# Altium PCB Robot.PcbDoc
Units mil, origin at the board's own origin, x right, y up, seen from the top; angles counter-clockwise.
Board outline 3890.31 x 3610.54 mil, 2 copper layers (TopLayer, BottomLayer); 99 components, 107 nets, 414 pads, 179 vias.
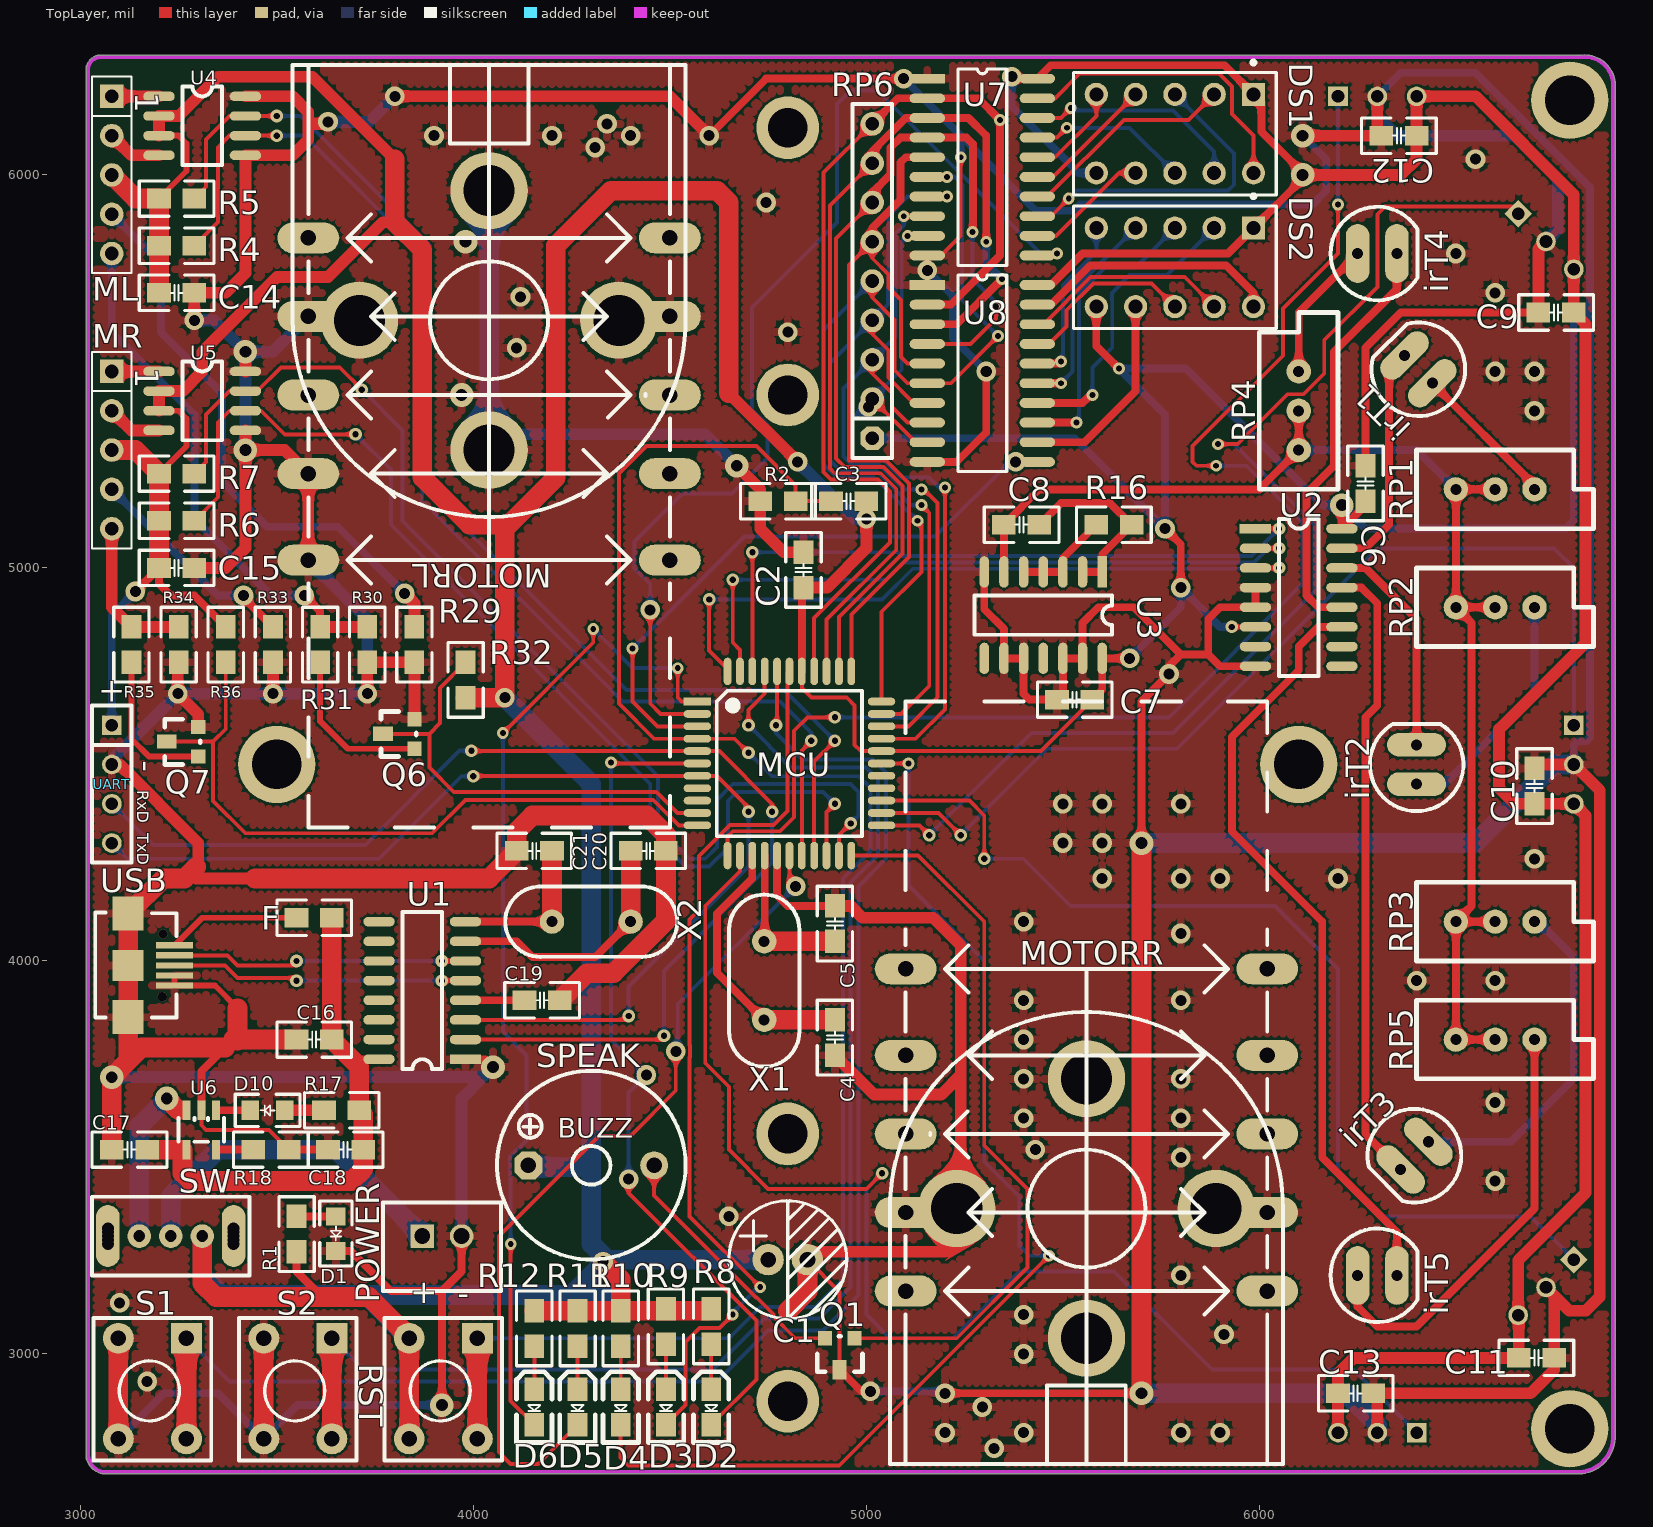
[diagram p0: TopLayer view]
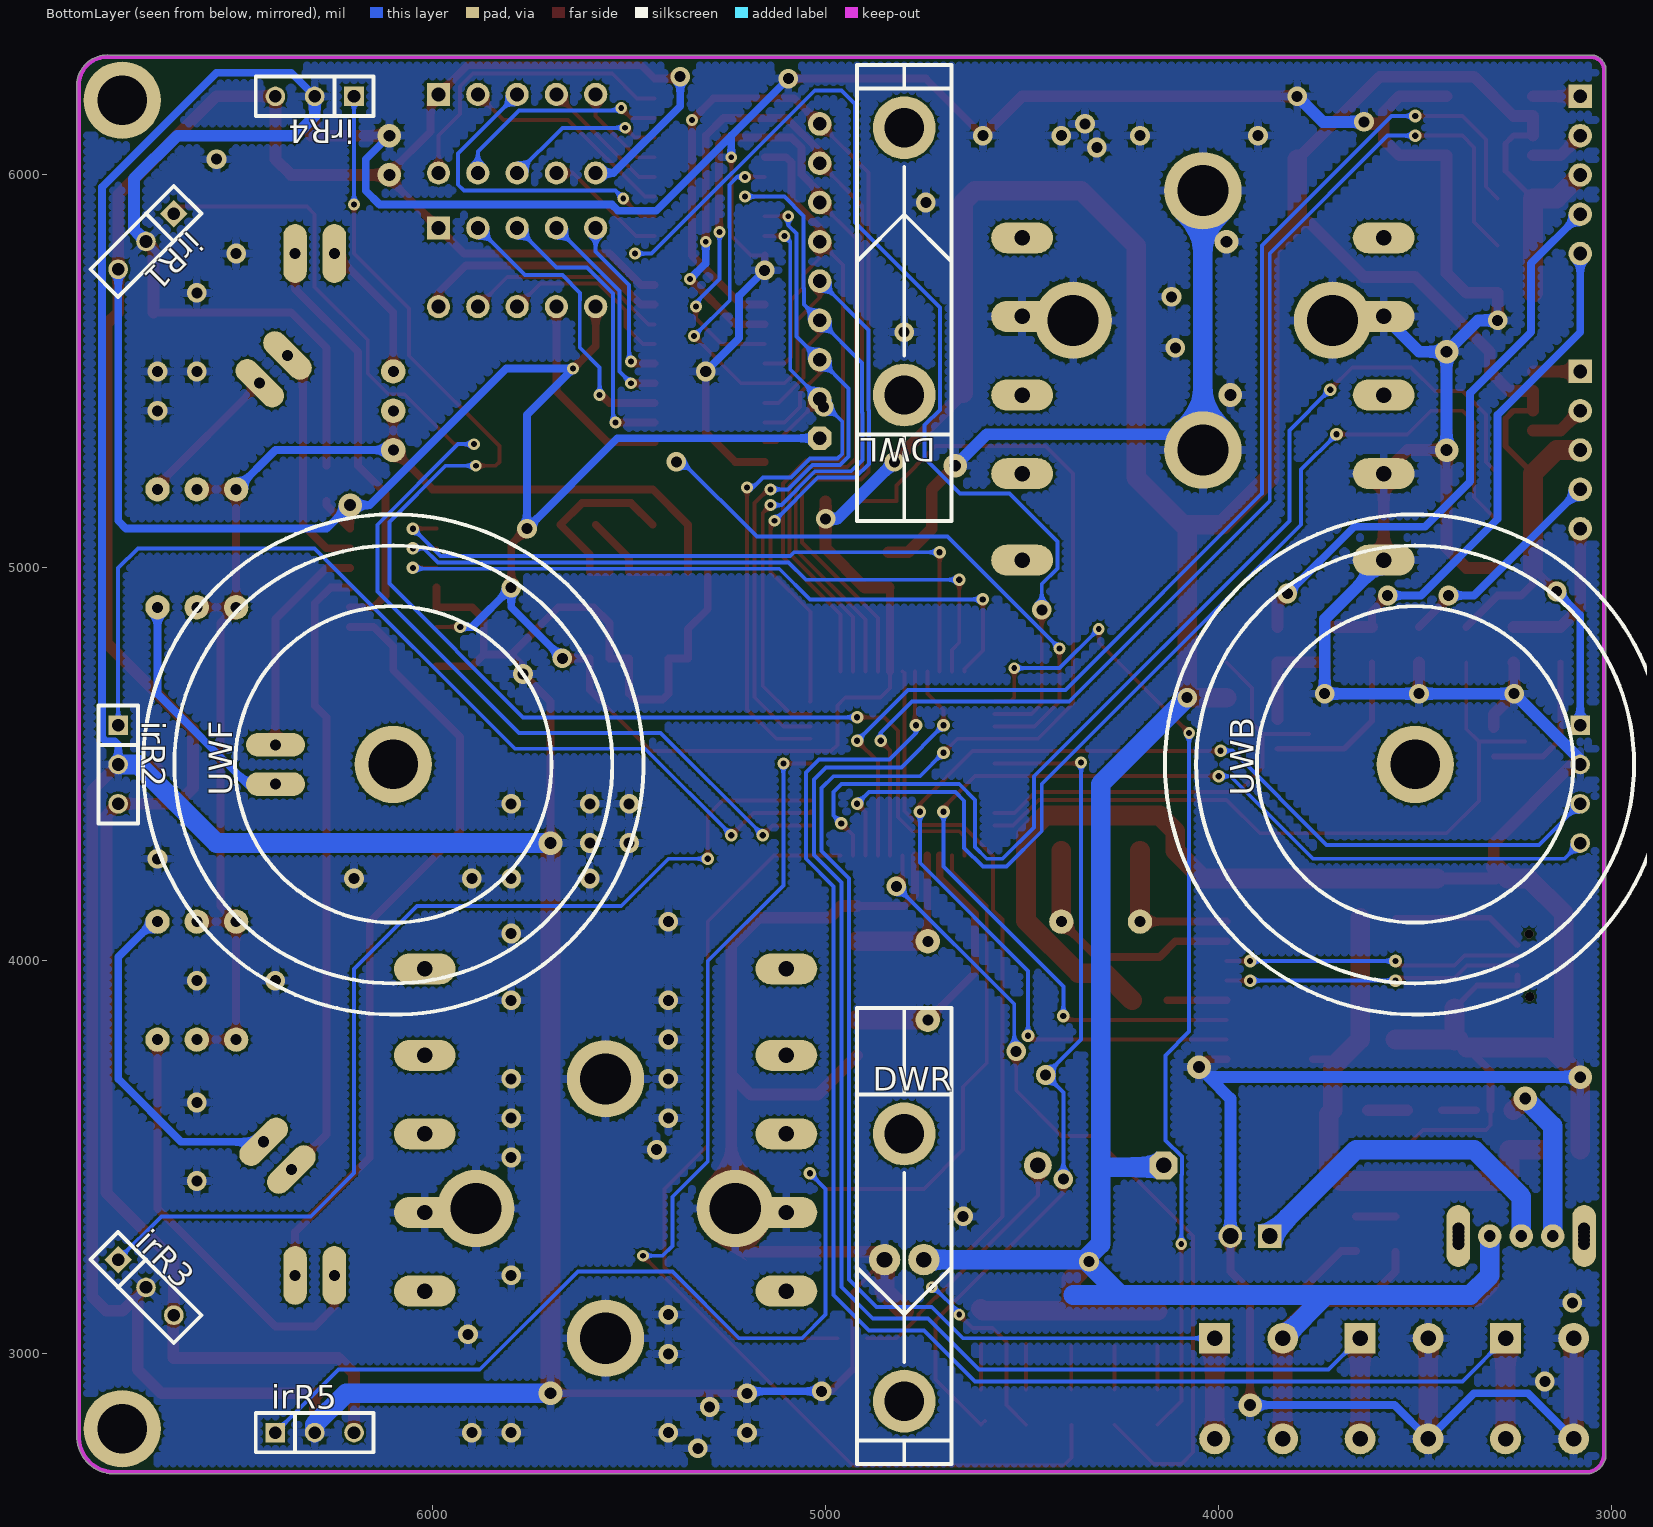
[diagram p1: BottomLayer view, seen from below]

## Layer stack, top to bottom
TopSolder: solder mask 0.4, Solder Resist, Dk 3.5
TopLayer: signal copper 1.4
Dielectric1: core 12.6, FR-4, Dk 4.8
BottomLayer: signal copper 1.4
BottomSolder: solder mask 0.4, Solder Resist, Dk 3.5

## Board outline
3014.99,2739.73 cw(c3065,2745) 3014.99,2750.27 3014.99,6264.81 cw(c3052.5,6267.5) 3014.99,6270.19 3014.99,6275 cw(c3020,6275) 3016.59,6278.67 cw(c3052.5,6267.5) 3049.62,6305 cw(c3050,6300) 3050,6305.02 6819.74,6305.02 cw(c6827.5,6227.5) 6904.99,6235.52 cw(c6900,6235) 6905.02,6235 6905.02,2785 6905.01,2785 cw(c6900,2785) 6905.01,2784.72 cw(c6810,2790) 6822.54,2695.68 cw(c6820,2700) 6820,2694.99 6815.14,2694.99 cw(c6810,2790) 6804.86,2694.99 3060,2694.99 cw(c3060,2700) 3059.45,2695.02 cw(c3065,2745) 3016.61,2731.31 cw(c3020,2735) 3014.99,2735

## Design rules (kind name [scope] priority, off if disabled: settings)
Clearance [All] p1: gap=6
FabricationTestPointUsage TestPointUsage [All] p1: valid=0 allowmultiple=FALSE
FabricationTestpoint Testpoint [All] p1: side=3 testpointundercomponent=TRUE minsize=40 maxsize=100 preferedsize=60 minholesize=20 maxholesize=40 preferedholesize=32 testpointgrid=1 allowsidetop=TRUE allowsidebottom=TRUE usegrid=TRUE gridtolerance=0.01
PasteMaskExpansion PasteMaskExpansion_1 [All] p1: expansion=0
PasteMaskExpansion [All] p2: expansion=0
PlaneClearance PlaneClearance_1 [All] p1: clearance=20
PlaneClearance [All] p2: clearance=10
PolygonConnect [All] p1: connectstyle=Relief reliefconductorwidth=20 reliefentries=4 polygonreliefangle="90 Angle" airgapwidth=10
RoutingVias [All] p1: holewidth=28 width=50 viastyle="Through Hole" minholewidth=28 minwidth=50 maxholewidth=28 maxwidth=50
ShortCircuit ShortCircuit_1 [All] p1: allowed=FALSE
ShortCircuit [All] p2: allowed=FALSE
SolderMaskExpansion SolderMaskExpansion_1 [All] p1: expansion=4
SolderMaskExpansion [All] p2: expansion=2
UnRoutedNet UnRoutedNet_1 [All] p1:
UnRoutedNet [All] p2:
Width [All] p1: maxlimit=50 minlimit=10 preferedwidth=20 minimp=50.000000 maximp=50.000000 favimp=50.000000
24 further rules are at their usual default settings.

## Components (designator, comment, footprint, x,y, rotation, side; value= is the part's Value field where it differs from the comment)
C1 "1000uF" RB.1/.3 4750,3240 r180 top
C2 "104" 0805C 4840,4950 r90 top
C3 "474" 0805C 5000,5170 r180 top
C4 "20" 0805C 4920,3850 r270 top
C5 "20" 0805C 4920,4050 r90 top
C6 "104" 0805C 6270,5260 r270 top
C7 "104" 0805C 5575,4665 r180 top
C8 "102" 0805C 5350,5110 r0 top
C9 "104" 0805C 6800,5650 r180 top
C10 "104" 0805C 6700,4400 r90 top
C11 "104" 0805C 6660,2990 r0 top
C12 "104" 0805C 6400,6100 r180 top
C13 "104" 0805C 6200,2900 r0 top
C14 "104" 0805C 3200,5700 r0 top
C15 "104" 0805C 3200,5000 r0 top
C16 "10uF" 0805C 3640,3800 r180 top
C17 "1uF" 0805C 3170,3520 r180 top
C18 "104" 0805C 3720,3520 r180 top
C19 "103" 0805C 4220,3900 r180 top
C20 "20" 0805C 4400,4280 r0 top
C21 "20" 0805C 4200,4280 r180 top
D1 "LED" 0805D#1 3650,3350 r270 top
D2 "LED" 0805D#2 4605,2910 r270 top
D3 "LED" 0805D#2 4490,2910 r270 top
D4 "LED" 0805D#2 4375,2910 r270 top
D5 "LED" 0805D#2 4265,2910 r270 top
D6 "LED" 0805D#2 4155,2910 r270 top
D10 "LED" 0805D#1 3520,3620 r180 top
DS1 "Dpy Red-CA" A 5785,6105 r270 top
DS2 "Dpy Red-CA" A 5785,5765 r270 top
DWL "DW" DW 4800,5440 r90 bottom
DWR "DW" DW 4800,3560 r270 bottom
F "500MA" 0805R 3550,4110 r0 top
irR1 "HS0038" SIP3 6658.58,5901.42 r315 bottom
irR2 "HS0038" SIP3 6800,4600 r270 bottom
irR3 "HS0038" SIP3 6800,3240 r225 bottom
irR4 "HS0038" SIP3 6200,6200 r0 bottom
irR5 "HS0038" SIP3 6400,2800 r180 bottom
irT1 "irLED" LED-5-TOP 6440,5470 r135 top
irT2 "irLED" LED-5-TOP 6400,4450 r90 top
irT3 "irLED" LED-5-TOP 6430,3540 r225 top
irT4 "irLED" LED-5-TOP 6250,5800 r0 top
irT5 "irLED" LED-5-TOP 6250,3200 r0 top
MCU "STC89C52" TQFP-44 4570,4660 r0 top
ML "Comment" SIP5 3080,6200 r270 top
MOTORL "MOTOR" MOTOR 4040,5320 r90 top
MOTORR "MOTOR" MOTOR 5560,3680 r270 top
MR "Comment" SIP5 3080,5500 r270 top
POWER "DC3.7V" XH2.54-2P 3870,3300 r0 top
Q1 "8550" SOT-23-P 4970,3040 r180 top
Q6 "Comment" SOT-23-N 3850,4540 r90 top
Q7 "Comment" SOT-23-N 3300,4520 r90 top
R1 "2K" 0805R 3550,3260 r90 top
R2 "10K" 0805R 4730,5170 r0 top
R4 "2K" 0805R 3200,5820 r0 top
R5 "2K" 0805R 3200,5940 r0 top
R6 "2K" 0805R 3200,5120 r0 top
R7 "2K" 0805R 3200,5240 r0 top
R8 "2K" 0805R 4605,3115 r270 top
R9 "2K" 0805R 4490,3115 r270 top
R10 "2K" 0805R 4375,3110 r270 top
R11 "2K" 0805R 4265,3110 r270 top
R12 "2K" 0805R 4155,3110 r270 top
R16 "13K" 0805R 5675,5110 r180 top
R17 "2K" 0805R 3710,3620 r180 top
R18 "2K" 0805R 3530,3520 r180 top
R29 "Comment" 0805R 3850,4850 r270 top
R30 "Comment" 0805R 3730,4850 r270 top
R31 "Comment" 0805R 3610,4850 r270 top
R32 "Comment" 0805R 3980,4670 r90 top
R33 "Comment" 0805R 3490,4850 r270 top
R34 "Comment" 0805R 3250,4850 r270 top
R35 "Comment" 0805R 3130,4850 r270 top
R36 "Comment" 0805R 3370,4850 r270 top
RP1 "100K" VR-5 6500,5200 r0 top
RP2 "100K" VR-5 6500,4900 r0 top
RP3 "100K" VR-5 6500,4100 r0 top
RP4 "100K" VR-5 6100,5300 r90 top
RP5 "100K" VR-5 6500,3800 r0 top
RP6 "10K" "SIP9 - duplicate" 5015,5330 r90 top
RST "SW-PB" SWITCH 4010,3040 r270 top
S1 "SW-PB" SWITCH 3270,3040 r270 top
S2 "SW-PB" SWITCH 3640,3040 r270 top
SPEAK "BUZZER" BUZZ 4140,3480 r0 top
SW "SW SPDT" SW-1-2 3150,3300 r0 top
U1 "CH340G" SOP-16 3980,3750 r180 top
U2 "74HC138" SOP-16 5990,5100 r0 top
U3 "74HC00" SO-14 5600,4990 r270 top
U4 "L9110" SO-8 3200,6200 r0 top
U5 "L9110" SO-8 3200,5500 r0 top
U6 "TP4054" SOT-23-5 3270,3520 r0 top
U7 "74HC573" SOP-20（1.27） 5155,6245 r0 top
U8 "74HC573" SOP-20（1.27） 5155,5720 r0 top
UART "SIP4" SIP4 3080,4600 r270 top
USB "MicroUSB" MircoUSB 3230,4040 r180 top
UWB "UW" UW 3500,4500 r180 bottom
UWF "UW" UW 6100,4500 r180 bottom
X1 "24M" XTAL2 4740,4050 r270 top
X2 "12M" XTAL2 4400,4100 r180 top

## Footprints (in the part's own frame and the unit in brackets; to place one, negate y for a bottom-side part, rotate by r counter-clockwise, add the part's x,y. Pads: shape width x height; smd on the part's side, far side on the other; paste and mask are expansions set on the pad)
0805C [mil]
  rect 60x50 smd: 1(0,0) 2(90,0)
  silkscreen extent -50,-45 140,45
0805D#1 [mil]
  rect 45x50 smd: 1(0,0) 2(88,0)
  silkscreen extent -39,-41 126,41
0805D#2 [mil]
  rect 60x50 smd: 1(0,0) 2(90,0)
  silkscreen extent -45,-45 135,45
0805R [mil]
  rect 60x50 smd: 1(0,0) 2(90,0)
  silkscreen extent -50,-45 140,45
A [mm]
  rect 1.5x1.5 hole 0.9: 1(-2.54,5.08)
  round 1.5 hole 0.9: 2(-2.54,2.54) 3(-2.54,0) 4(-2.54,-2.54) 5(-2.54,-5.08) 6(2.54,-5.08) 7(2.54,-2.54) 8(2.54,0) 9(2.54,2.54) 10(2.54,5.08)
  silkscreen extent -4.72,-6.55 3.95,6.55, body extent -3.95,-6.55 3.95,6.55, height 6.34
BUZZ [mm]
  oct 1.8x1.8 hole 1: 1(0,0)
  round 1.8 hole 1: 2(8.128,0)
  silkscreen extent -2.03,-6.09 10.17,6.11
DW [mil]
  round 160 hole 100: 0(0,0) 0(680,0)
  silkscreen extent -320,-120 840,120
LED-5-TOP [mil]
  oval 60x150 hole 28: 1(0,0) 2(100,0)
  silkscreen extent -69,-119 153,119
MircoUSB [mm]
  rect 2.4x0.4 smd: 1(-0.25,0) 2(-0.25,0.65) 3(-0.25,1.3) 4(-0.25,1.95) 5(-0.25,2.6)
  rect 2x2.2 smd: 6(2.75,4.65) 7(2.75,-2.05)
  rect 2x2 smd: 8(2.75,1.3)
  silkscreen extent -0.37,-2.12 4.88,4.67
MOTOR [mm]
  oval 2x4 hole 1: 0(-7.62,-11.684) 0(-7.62,11.684) 0(-2.032,11.684) 0(-2.032,-11.684) 0(3.048,11.684) 0(3.048,-11.684) 0(8.128,-11.684) 0(8.128,11.684) 0(13.208,-11.684) 0(13.208,11.684)
  silkscreen extent -24.89,-11.68 24.38,11.68
RB.1/.3 [mil]
  round 80 hole 40: 1(0,0) 2(-100,0)
  silkscreen extent -200,-150 100,150
SIP3 [mil]
  rect 50x50 hole 32: 1(0,0)
  round 50 hole 32: 2(100,0) 3(200,0)
  silkscreen extent -50,-50 250,50
SIP4 [mil]
  rect 50x50 hole 32: 1(0,0)
  round 50 hole 32: 2(100,0) 3(200,0) 4(300,0)
  silkscreen extent -50,-50 350,50
SIP5 [mil]
  rect 60x60 hole 35: 1(0,0)
  round 60 hole 35: 2(100,0) 3(200,0) 4(300,0) 5(400,0)
  silkscreen extent -50,-50 450,50
"SIP9 - duplicate" [mil]
  oct 60x60 hole 35: 1(0,0)
  round 60 hole 35: 2(100,0) 3(200,0) 4(300,0) 5(400,0) 6(500,0) 7(600,0) 8(700,0) 9(800,0)
  silkscreen extent -50,-50 850,50
SO-8 [mil]
  oval 80x24 smd: 1(0,0) 2(0,-50) 3(0,-100) 4(0,-150) 5(220,-150) 6(220,-100) 7(220,-50) 8(220,0)
  silkscreen extent 60,-175 160,25
SO-14 [mil]
  rect 80x24 smd: 1(0,0)
  oval 80x24 smd: 2(0,-50) 3(0,-100) 4(0,-150) 5(0,-200) 6(0,-250) 7(0,-300) 8(220,-300) 9(220,-250) 10(220,-200) 11(220,-150) 12(220,-100) 13(220,-50) 14(220,0)
  silkscreen extent 60,-325 160,25
SOP-16 [mil]
  rect 80x24 smd: 1(0,0)
  oval 80x24 smd: 2(0,-50) 3(0,-100) 4(0,-150) 5(0,-200) 6(0,-250) 7(0,-300) 8(0,-350) 9(220,-350) 10(220,-300) 11(220,-250) 12(220,-200) 13(220,-150) 14(220,-100) 15(220,-50) 16(220,0)
  silkscreen extent 60,-375 160,25
SOP-20（1.27） [mil]
  rect 90x25 smd: 1(0,0)
  oval 90x25 smd: 2(0,-50) 3(0,-100) 4(0,-150) 5(0,-200) 6(0,-250) 7(0,-300) 8(0,-350) 9(0,-400) 10(0,-450) 11(280,-450) 12(280,-400) 13(280,-350) 14(280,-300) 15(280,-250) 16(280,-200) 17(280,-150) 18(280,-100) 19(280,-50) 20(280,0)
  silkscreen extent 78,-475 202,25
SOT-23-5 [mil]
  rect 20x50 smd: 1(75,100) 2(38,100) 3(0,100) 4(0,0) 5(75,0)
  silkscreen extent -20,20 95,80
SOT-23-N [mil]
  rect 36x36 smd: 1(0,0) 3(75,0)
  rect 36x50 smd: 2(38,80)
  silkscreen extent -20,-5 95,85
SOT-23-P [mil]
  rect 36x36 smd: 1(0,0) 2(75,0)
  rect 36x50 smd: 3(38,80)
  silkscreen extent -20,-5 95,85
SW-1-2 [mil]
  oval 60x157.48 hole 30: 0(-80,0) 0(240,0)
  round 60 hole 30: 1(80,0) 2(0,0) 3(160,0)
  silkscreen extent -120,-100 280,100
SWITCH [mm]
  rect 2x2 hole 1: 1(0,0)
  round 2 hole 1: 1(6.5,0) 2(0,-4.4) 2(6.5,-4.4)
  silkscreen extent -1.3,-6 7.9,1.6
TQFP-44 [mm]
  rect 1.778x0.5 smd: 1(0,0)
  oval 1.778x0.5 smd: 2(0,-0.8) 3(0,-1.6) 4(0,-2.4) 5(0,-3.2) 6(0,-4) 7(0,-4.8) 8(0,-5.6) 9(0,-6.4) 10(0,-7.2) 11(0,-8) 23(11.9,-8) 24(11.9,-7.2) 25(11.9,-6.4) 26(11.9,-5.6) 27(11.9,-4.8) 28(11.9,-4) 29(11.9,-3.2) 30(11.9,-2.4) 31(11.9,-1.6) 32(11.9,-0.8) 33(11.9,0)
  oval 0.5x1.778 smd: 12(1.95,-9.95) 13(2.75,-9.95) 14(3.55,-9.95) 15(4.35,-9.95) 16(5.15,-9.95) 17(5.95,-9.95) 18(6.75,-9.95) 19(7.55,-9.95) 20(8.35,-9.95) 21(9.15,-9.95) 22(9.95,-9.95) 34(9.95,1.95) 35(9.15,1.95) 36(8.35,1.95) 37(7.55,1.95) 38(6.75,1.95) 39(5.95,1.95) 40(5.15,1.95) 41(4.35,1.95) 42(3.55,1.95) 43(2.75,1.95) 44(1.95,1.95)
  silkscreen extent 1.25,-8.7 10.65,0.7
UW [mm]
  round 5 hole 3.2: 0(0,0)
  silkscreen extent -16.17,-16.17 16.16,16.17
VR-5 [mil]
  round 62 hole 28: 1(0,0) 2(100,0) 3(200,0)
  silkscreen extent -100,-100 350,100
XH2.54-2P [mil]
  rect 60x60 hole 40: 1(0,0)
  round 60 hole 40: 2(100,0)
  silkscreen extent -100,-140 200,85
XTAL2 [mil]
  round 62 hole 28: 1(0,0) 2(200,0)
  silkscreen extent -119,-89 319,89

## Part data
C1: library part ELECTRO1, "Electrolytic Capacitor"
C2 C3 C4 C5 C6 C7 C8 C9 C10 C11 C12 C13 C14 C15 C16 C17 C18 C19 C20 C21: library part CAP, "Capacitor"
DS1 DS2: "7.62 mm Black Surface HER 7-Segment Display: CA, RH DP"
DWL DWR: "driving wheel"
F: library part FUSE1, "Fuse"
irR1 irR2 irR3 irR4 irR5: library part CON3, "Connector"
irT1 irT2 irT3 irT4 irT5: library part LED
MCU: library part STC89C52RC-PQFP, "MCU"
ML MR: library part "Header 5", "5PIN"
POWER: library part CON2, "Connector"
Q1: library part PNP1, "PNP Transistor"
Q6 Q7: library part QNPN, "NPN三极管"
R1 R2 R4 R5 R6 R7 R8 R9 R10 R11 R12 R16 R17 R18: library part RES2
R29 R30 R31 R32 R33 R34 R35 R36: library part Res2, "电阻"
RP1 RP2 RP3 RP4 RP5: library part POT2, "Potentiometer"
RP6: library part "Res Pack2", "9PIN排阻"
SPEAK: "Buzzer"
U1: "USB-SERIAL"
U2: library part 74ALS138
U3: "Quad 2-Input Positive-NAND Gate"
UART: library part CON4, "Connector"
USB: library part CON5, "Connector"
UWB UWF: "universal wheel"
X1 X2: library part CRYSTAL, "Crystal"

## Free pads (board coordinates)
  round 196.85 hole 129.92: 0(3710,5630) 0(4040,5300) 0(4040,5960) 0(4370,5630) 0(5230,3370) 0(5560,3040) 0(5560,3700) 0(5890,3370)
  round 196.85 hole 125.98: 0(6790,2810) 0(6790,6190)

## Via types
v1: diameter 50, hole 28, TopLayer to BottomLayer, 85 vias
v2: diameter 30, hole 15, TopLayer to BottomLayer, 37 vias
v3: diameter 32, hole 16, TopLayer to BottomLayer, 33 vias
v4: diameter 60, hole 30, TopLayer to BottomLayer, 14 vias
v5: diameter 30, hole 30, TopLayer to BottomLayer, 8 vias
v6: diameter 23.62, hole 23.62, TopLayer to BottomLayer, 2 vias

## Nets (pads, with @x,y where several pads share a name; then routed paths per layer and width w, separated by ;. In a path a pad name is that pad's centre, name@x,y a point inside that pad or via, vN(x,y) a via of type N, cw(c..) or ccw(c..) an arc to the next point about the centre after c; other vN are vias at no path point)
+5V: C16.1 C17.1 C18.1 F.2 R17.1 U1.16 U6.4 | length 1363.8
  TopLayer w20: 3690,3750 U1.16
  TopLayer w30: R17.1 R17.1@3720,3610
  TopLayer w50: C17.1@3180,3520 3260,3520 3260,3460 3280,3440 3320,3440 3690,3440 3720,3470 C18.1 R17.1@3720,3610 ; F.2 C16.1 3710,3730 R17.1
A0: MCU.42 U2.1 | length 1736.5
  TopLayer w10: MCU.42 4709.76,5039.76 v3(4710,5040) ; U2.1 v3(6050,5100)
  BottomLayer w10: v3(4710,5040) 5080,5040 5090,5030 5980,5030 v3(6050,5100)
A1: MCU.43 U2.2 | length 1723.9
  TopLayer w10: v3(4660,4970) 4660,4810 4678.27,4791.73 MCU.43 ; U2.2 v3(6050,5050)
  BottomLayer w10: v3(4660,4970) 5050,4970 5094,5014 5986.63,5014 6022.63,5050 v3(6050,5050)
A2: MCU.44 U2.3 | length 1745.7
  TopLayer w10: v3(4600,4920) 4600,4790 4646.77,4743.23 MCU.44 ; U2.3 v3(6050,5000)
  BottomLayer w10: v3(4600,4920) 5040,4920 5118,4998 6048,4998 v3(6050,5000)
B1: DS1.9 U7.18 | length 560.9
  TopLayer w10: U7.18 5495,6145 v2(5520,6170)
  BottomLayer w10: v2(5520,6170) 5525.53,6164.47 5780.53,6164.47 5885,6060 DS1.9
B2: DS2.9 U8.18 | length 530.8
  TopLayer w10: U8.18 5450.73,5620 5570.73,5740 5810,5740 DS2.9
C1: DS1.8 U7.17 | length 408
  TopLayer w10: U7.17 5485,6095 v2(5510,6120)
  BottomLayer w10: v2(5510,6120) 5670,6120 DS1.8
C2: DS2.8 U8.17 | length 462.6
  TopLayer w10: U8.17 5465,5570 5509.18,5614.18 5509.18,5655.82 5577.36,5724 5726,5724 DS2.8
CH_RXD: 
CHRG: SW.2 U6.3 | length 441.4
  TopLayer w30: v4@3210,3650 v4@3230,3650
  TopLayer w50: v4(3220,3650) 3250,3620
  BottomLayer w50: SW.2 3150,3580 v4(3220,3650)
CLOCK: C8.1 RP1.1 RP1.2 RP2.1 RP2.2 RP3.1 RP3.2 RP4.1 RP4.2 RP5.1 RP5.2 U3.6 | length 3323.3
  TopLayer w20: U3.6 C8.1 5440,5200 6000,5200 RP4.1 RP4.2 ; RP5.2 RP5.1 RP3.1 ; RP3.2 RP3.1 ; RP2.2 RP2.1 ; RP1.2 RP1.1 RP2.1 ; RP3.1 6540,4140 6540,4860 RP2.1
  BottomLayer w20: RP4.1 6400,5300 RP1.1
D1: DS1.5 U7.16 | length 248.5
  TopLayer w10: U7.16 5480,6045 5585,6150 DS1.5
D2: DS2.5 U8.16 | length 439.4
  TopLayer w20: U8.16 5490,5520 v2(5495,5525)
  BottomLayer w10: v2(5495,5525) 5500,5530 5500,5720 5585,5805 DS2.5
D+: U1.5 USB.3 | length 756.2
  TopLayer w10: USB.3 3368.19,3988.82 3400,3957.01 3542.99,3957.01 v3(3550,3950) ; v3(3920,3950) U1.5
  BottomLayer w10: v3(3550,3950) v3(3920,3950)
D-: U1.6 USB.2 | length 755.7
  TopLayer w10: USB.2 3374.09,4014.41 3400,3988.5 3538.5,3988.5 v3(3550,4000) ; v3(3920,4000) U1.6
  BottomLayer w10: v3(3550,4000) v3(3920,4000)
DP1: DS1.7 U7.12 | length 316.3
  TopLayer w10: U7.12 5482.31,5845 5642.31,6005 DS1.7
DP2: DS2.7 U8.12 | length 518.8
  TopLayer w20: U8.12 5555,5320 5685,5450 DS2.7
E1: DS1.4 U7.15 | length 337
  TopLayer w10: U7.15 5475,5995 DS1.4
E2: DS2.4 U8.15 | length 533.7
  TopLayer w20: U8.15 v2(5495,5470)
  BottomLayer w10: v2(5495,5470) 5525,5500 5525,5705 DS2.4
F1: DS1.2 U7.14 | length 557.7
  TopLayer w10: U7.14 5460,5945 5655,6140 5820,6140 DS1.2
F2: DS2.2 U8.14 | length 752.8
  TopLayer w20: U8.14 5550,5420 v2@5570,5440
  BottomLayer w10: v2(5575,5440) 5575,5510 5625.53,5560.53 5625.53,5681.79 5625,5682.31 5625,5700 5670,5745 5765,5745 DS2.2
G1: DS1.3 U7.13 | length 825.3
  TopLayer w10: U7.13 5470,5895 v2(5515,5940)
  BottomLayer w10: v2(5515,5940) 5535,5960 5920,5960 5935,5975 5935,6055 DS1.3
G2: DS2.3 U8.13 | length 743.9
  TopLayer w20: U8.13 v2(5535,5370)
  BottomLayer w10: v2(5535,5370) 5541,5376 5541,5698.37 5607.63,5765 5685,5765 DS2.3
GND: C1.2 C2.2 C4.2 C5.2 C6.1 C7.2 C9.2 C10.2 C11.2 C12.2 C13.2 C14.2 C15.2 C16.2 C17.2 C18.2 C19.1 C20.2 C21.2 D1.2 irR1.2 irR2.2 irR3.2 irR4.2 irR5.2 MCU.16 MOTORL.0@3580,5020 MOTORL.0@3580,5240 MOTORL.0@3580,5640 MOTORL.0@4500,5640 MOTORR.0@5100,3360 MOTORR.0@6020,3360 pad.0@3710,5630 pad.0@4040,5300 pad.0@4040,5960 pad.0@4370,5630 pad.0@5230,3370 pad.0@5560,3040 pad.0@5560,3700 pad.0@5890,3370 POWER.2 Q1.3 Q6.3 Q7.3 R2.1 R18.1 R29.2 R30.2 R33.2 R34.2 S1.2 S2.2 U1.1 U2.4 U2.5 U2.8 U3.7 U3.9 U3.10 U3.12 U3.13 U4.5 U4.8 U5.5 U5.8 U6.2 U7.1 U7.10 U8.1 U8.10 UART.2 USB.4 USB.5 USB.6 USB.7 USB.8 | length 33560.2
  TopLayer w10: U6.2 3308,3582 3320,3570 3480,3570 R18.1 ; D1.2@3648,3262 D1.2 ; C1.2 4932,3158 Q1.3 ; U7.10 5190,5795 5240,5845 v2(5240,6045)
  TopLayer w15: USB.4 USB.5 3342.36,3937.64 3400,3880
  TopLayer w20: U6.2 3308,3719.34 3368.5,3779.84 ; R18.1 C18.2 ; D1.2 3688,3262 3790,3160 3920,3160 ; v4(3920,2870) 3920,3160 ; POWER.2 3970,3210 3920,3160 ; U1.1 4030,3750 v4(4050,3730) ; v1(4600,6100) 4745,6245 v1(5095,6245) ; MCU.16 4772.76,4167.24 4800,4140 C5.2 ; Q1.3 4987,2905 v1(5010,2905) ; U8.10 5230,5270 5305,5345 v1(5305,5500) v1@5305,5505.16 ; v1(5155,5757.5) U7.10 ; v1(5200,2900) v4(5700,2900) ; U3.7 5300,4895 5350,4845 U3.9 U3.10 5400,4680 5415,4665 C7.2 5500,4680 U3.12 U3.13 5550,4860 5590,4900 5680,4900 5800,4780 ; v4(5700,4300) 5700,4660 v1(5770,4730) 5770,4750 5800,4780 ; U2.8 5900,4750 5870,4780 ; U2.4 U2.5 5900,4900 5870,4870 5870,4780 ; C6.1 6270,5560 6360,5650 C9.2 ; 5800,4780 5870,4780
  TopLayer w30: UART.2 3100,4500 3300,4300 3300,4245 3295,4240 3295,4210 3444.33,4210 ; R34.2 3248,4758 v1(3248,4680) 3300,4628 Q7.3 ; C15.2 3370,5000 3420,5050 v4(3420,5300) ; v1(3290,5630) C14.2 3370,5700 3420,5750 U4.5 3540,6050 3580,6090 3580,6130 ; 3368.5,3779.84 3388.66,3800 ; U5.5 v4(3420,5300) ; U5.8 v4(3420,5550) ; U4.8 3540,6200 3580,6160 3580,6130 ; v1(3490,4680) R33.2 ; MOTORL.0@3580,5020 3580,5240 3520,5300 v4(3420,5300) ; v1(3630,6135) 3625,6130 3580,6130 ; v1(3730,4680) R30.2 R29.2 Q6.3 ; v1(3800,6200) 4500,6200 v1(4600,6100) ; v4(4670,5260) 4730,5200 R2.1 4730,5100 4790,5040 C2.2 ; C1.2 4870,3260 5200,3260 5240,3300 5240,4040 5170,4110 4990,4110 4960,4140 C5.2 ; C4.2 5020,3660 5190,3660 5240,3710 ; v4(6110,6100) C12.2 6300,6110 irR4.2 ; irR5.2 6300,2890 C13.2 6690,2900 6750,2960 C11.2 6750,3148.58 ; C10.2 6710,4500 irR2.2 6866,4434 6866,3145 6831,3110 6788.58,3110 6750,3148.58 ; C9.2 6710,5811.42 irR1.2 ; irR3.2 6750,3148.58
  TopLayer w50: C17.2 v4(3080,3703.94) 3121.73,3745.67 ; S1.2@3096.77,2784.09 S1.2@3096.77,3040 ; 3295,4240 3265,4210 3211.02,4210 USB.7 USB.8 USB.6 3121.73,3745.67 ; 3368.5,3779.84 3155.9,3779.84 3121.73,3745.67 ; 3388.66,3800 C16.2 ; 3400,3797.32 3400,3880 ; 3444.33,4210 4040,4210 C21.2 4110,4330 4150,4370 4441.15,4370 4490,4321.15 C20.2 4490,4102.32 4356.68,3969 4289,3969 C19.1 ; S2.2@3466.77,2784.09 S2.2@3466.77,3040 ; 4800,3110 4850,3160 C1.2 ; v4(5700,2900) v4(5700,4300)
  BottomLayer w10: S2.2@3465.91,2784.09 S2.2@3466.77,2784.09
  BottomLayer w20: S1.2@3096.77,2784.09 3212.68,2900 3350,2900 S2.2@3465.91,2784.09 ; S2.2@3466.77,2784.09 3552.68,2870 v4(3920,2870) ; v1(5010,2905) 5195,2905 v1(5200,2900) ; v1(5095,6245) 5240,6100 ; v1(5155,5757.5) 5220,5692.5 5220,5585 v1(5305,5500) ; v2(5240,6045) 5240,6100 ; v4(6110,6100) 6170,6040 6170,5960 6135,5925 5543.84,5925 5527.84,5909 5431,5909 5240,6100 ; irR4.2 6360,6260 6550,6260 6841,5969 6841,4568.37 6831.63,4559 6809.5,4559 6800,4549.5 irR2.2
  BottomLayer w30: v4(3080,3703.94) 3081.06,3705 4025,3705 ; UART.2 3080,4512 v1(3248,4680) v1(3490,4680) v1(3730,4680) 3730,4870 MOTORL.0@3580,5020 ; v1(3290,5630) 3340,5630 v4(3420,5550) ; v4(3420,5300) v4(3420,5550) ; v1(3630,6135) 3735,6135 v1(3800,6200) ; pad.0@3710,5630 3700,5640 3580,5640 3490,5550 v4(3420,5550) ; POWER.2 3970,3650 4025,3705 ; pad.0@4030,5290 4080,5340 4590,5340 v4(4670,5260) ; v4(4050,3730) 4025,3705 ; irR4.2 6300,6150 6350,6100 6650,6100 6760,5990 6760,5861.42 irR1.2
  BottomLayer w50: pad.0@4040,5340 pad.0@4040,5960 ; v4(5700,2900) 6220,2900 6300,2820 irR5.2 ; v4(5700,4300) 6550,4300 6750,4500 irR2.2
  other v1: 5325,2760 5200,2800 5400,2800 5800,2800 5900,2800 5295,2865 3170,2930 5400,3000 5910,3050 5400,3100 3100,3130 5800,3200 4650,3350 6600,3440 5800,3500 5430,3520 5400,3600 5800,3600 6600,3640 5400,3700 5800,3700 5400,3800 5400,3900 5800,3900 6400,3950 6600,3950 5800,4070 5400,4100 5600,4210 5800,4210 5900,4210 6200,4210 6700,4260 5500,4300 5600,4300 5500,4400 5600,4400 5800,4400 6700,5400 6600,5500 6700,5500 4110,5560 4800,5600 4120,5690 6600,5700 6500,5800 4745,5930 6550,6040 4310,6070 3900,6100 4200,6100 4400,6100 4340,6130
  other v4: 3970,5440 3980,5830
INT0: MCU.8
INT1: MCU.9
IRR1: irR1.1 MCU.23 | length 3048.6
  TopLayer w10: MCU.23 5134.96,4345.04 v3(5160,4320) ; v2(5895,5315) 5945,5315 6072,5442 6112,5442 6165,5495 6165,5580 6300,5715 6300,5900 6320,5920 6640,5920 irR1.1
  BottomLayer w10: v3(5160,4320) 5420,4580 5780,4580 6140,4940 6140,5110 5935,5315 v2(5895,5315)
IRR2: irR2.1 MCU.24 | length 2516.5
  TopLayer w10: MCU.24@5030,4380 MCU.24@5038.5,4380 ; MCU.24 5183.47,4376.53 v3(5240,4320)
  BottomLayer w10: v3(5240,4320) 5460,4540 5790,4540 6300,5050 6750,5050 6800,5000 irR2.1
IRR3: irR3.1 MCU.25 | length 2614.4
  TopLayer w10: MCU.25 5261.97,4408.03 5300,4370 v3(5300,4260)
  BottomLayer w10: v3(5300,4260) 5400,4260 5520,4140 6040,4140 6200,3980 6200,3460 6310,3350 6690,3350 irR3.1
IRR4: irR4.1 MCU.12 | length 3495.9
  TopLayer w10: MCU.12 4646.77,4316.77 4660,4330 4780,4330 4815.75,4365.75 4815.75,4585.75 4850,4620 v3(4920,4620) ; v2(5890,5260) 5840,5260 5830,5270 5830,5310 6060,5540 6060,5660 6200,5800 v2(6200,5925)
  BottomLayer w10: v3(4920,4620) 5770,4620 6110,4960 6110,5117.37 5967.37,5260 v2(5890,5260) ; v2@6200,5920 v2(6200,5925) irR4.1
IRR5: irR5.1 MCU.13 | length 3299.3
  TopLayer w10: MCU.13 4678.27,4228.27 4590,4140 4590,3740 4650,3680 4650,3520 4750,3420 5000,3420 v3(5040,3460)
  BottomLayer w10: v3(5040,3460) 5000,3420 5000,3100 5060,3040 5220,3040 5390,3210 5630,3210 5880,2960 6240,2960 irR5.1
IRT1: irT1.2 U2.15 | length 591.8
  TopLayer w20: U2.15 6270,5050 6330,5110 6330,5501.42 irT1.2
IRT2: irT2.2 U2.14 | length 563.8
  TopLayer w20: U2.14 6270,5000 6400,4870 irT2.2
IRT3: irT3.2 U2.13 | length 1596.7
  TopLayer w20: U2.13 6260,4950 6300,4910 6300,4730 6300,4650 6270,4620 6270,3558.58 irT3.2
IRT4: irT4.2 U2.12 | length 1067.7
  TopLayer w20: U2.12 6150,4900 6120,4930 6120,5190 6190,5260 6190,5550 6350,5710 irT4.2
IRT5: irT5.2 U2.11 | length 1975.1
  TopLayer w20: U2.11 6150,4850 6100,4800 6100,4760 6100,4740 5930,4570 5930,4330 6160,4100 6160,3500 6350,3310 irT5.2
ML1: MCU.18 R4.2 U4.6 | length 3117.7
  TopLayer w10: R4.2 3350,5880 3350,6070 3380,6100 U4.6 v3(3500,6100) ; MCU.18 4835.75,4535.75 v3(4860,4560)
  BottomLayer w10: v3(3500,6100) 3570,6100 3870,5800 3870,5170 4380,4660 4780,4660 4860,4580 v3(4860,4560)
ML2: MCU.19 R5.2 U4.7 | length 3128.5
  TopLayer w10: R5.2 3320,5970 3320,6090 3380,6150 v3(3500,6150) ; MCU.19 4867.24,4507.24 v3(4920,4560)
  BottomLayer w10: v3(3500,6150) 3560,6150 3890,5820 3890,5190 4390,4690 4790,4690 v3(4920,4560)
MR1: MCU.20 R6.2 U5.6 | length 2792
  TopLayer w10: R6.2 3350,5180 3350,5370 3380,5400 3460,5400 3520,5340 v3(3700,5340) ; MCU.20 4898.74,4378.74 v3(4920,4400)
  BottomLayer w10: v3(3700,5340) 3790,5250 3790,5110 4450,4450 4450,4330 4540,4240 4600,4240 4647.61,4287.61 4647.61,4407.61 4670,4430 4890,4430 v3(4920,4400)
MR2: MCU.21 R7.2 U5.7 | length 2940.4
  TopLayer w10: R7.2 3320,5270 3320,5390 3380,5450 3450,5450 3510,5510 3660,5510 v3(3716.24,5453.76) ; MCU.21 4930.24,4320.24 v3(4960,4350)
  BottomLayer w10: v3(3716.24,5453.76) 3820,5350 3820,5120 4470,4470 4470,4340 4550,4260 4590,4260 4620,4290 4620,4410 4660,4450 4960,4450 4980,4430 4980,4370 v3(4960,4350)
NetC4_1: C4.1 MCU.14 X1.2 | length 685.5
  TopLayer w10: MCU.14 MCU.14@4710,4268.03
  TopLayer w20: MCU.14 4709.76,4209.76 4620,4120 4620,3970 X1.2
  TopLayer w50: X1.2 C4.1
NetC5_1: C5.1 MCU.15 X1.1 | length 398.8
  TopLayer w20: X1.1 4741.26,4051.26 MCU.15
  TopLayer w50: X1.1 C5.1
NetC8_2: C8.2 R16.1 U3.1 U3.2 | length 481.6
  TopLayer w20: C8.2 5495,5165 5620,5165 R16.1 5600,5035 U3.1 U3.2
NetC19_2: C19.2 U1.4 | length 150
  TopLayer w20: U1.4 C19.2
NetC20_1: C20.1 U1.7 X2.1 | length 653.8
  TopLayer w20: U1.7 4110,4050 4150,4010 4310,4010 X2.1
  TopLayer w50: X2.1 C20.1
NetC21_1: C21.1 U1.8 X2.2 | length 400
  TopLayer w20: U1.8 X2.2
  TopLayer w50: X2.2 C21.1
NetD1_1: D1.1 R1.2 | length 100
  TopLayer w20: R1.2 D1.1
NetD2_1: D2.1 R8.2 | length 115
  TopLayer w10: D2.1 R8.2
NetD3_1: D3.1 R9.2 | length 115
  TopLayer w10: D3.1 R9.2
NetD4_1: D4.1 R10.2 | length 110
  TopLayer w10: D4.1 R10.2
NetD5_1: D5.1 R11.2 | length 110
  TopLayer w10: D5.1 R11.2
NetD6_1: D6.1 R12.2 | length 110
  TopLayer w10: D6.1 R12.2
NetD10_1: D10.1 R17.2 | length 100
  TopLayer w30: D10.1 R17.2
NetD10_2: D10.2 U6.1 | length 87
  TopLayer w20: U6.1 D10.2
NetF_1: F.1 USB.1 | length 339.2
  TopLayer w15: USB.1 3309.84,4110 F.1
NetirT1_1: irT1.1 RP1.3 | length 377.7
  TopLayer w20: irT1.1 6700,5210 RP1.3
NetirT2_1: irT2.1 RP2.3 | length 615.3
  BottomLayer w20: irT2.1 6470,4450 6700,4680 RP2.3
NetirT3_1: irT3.1 RP3.3 | length 883.6
  BottomLayer w10: RP3.3 RP3.3@6710,4100
  BottomLayer w20: irT3.1 6640,3540 6800,3700 6800,4010 RP3.3@6710,4100
NetirT4_1: irT4.1 RP4.3 | length 362.1
  TopLayer w20: RP4.3 6100,5650 irT4.1
NetirT5_1: irT5.1 RP5.3 | length 1105
  TopLayer w20: irT5.1 6250,3120 6300,3070 6400,3070 6700,3370 RP5.3
NetMCU_40: MCU.40 S1.1 | length 3940.9
  TopLayer w10: v3(4770,4600) 4772.76,4602.76 MCU.40
  TopLayer w50: S1.1@3270,2784.09 S1.1@3270,3040
  BottomLayer w10: S1.1@3270,3040 3380,2930 4620,2930 4750,3060 4890,3060 4980,3150 4980,4190 5050,4260 5050,4480 5017.28,4512.72 4837.28,4512.72 4770,4580 v3(4770,4600)
NetMCU_41: MCU.41 S2.1 | length 3557.9
  TopLayer w10: v3(4700,4600) 4700,4638.74 4741.26,4680 MCU.41
  TopLayer w50: S2.1@3640,2784.09 S2.1@3640,3040
  BottomLayer w10: S2.1@3640,3040 3720,2960 4610,2960 4740,3090 4880,3090 4960,3170 4960,4200 5030,4270 5030,4461.72 4999,4492.72 4807.28,4492.72 v3(4700,4600)
NetML_1: ML.1 U4.1 | length 120
  TopLayer w30: ML.1 U4.1
NetML_2: ML.2 U4.4 | length 140.7
  TopLayer w30: ML.2 3130,6050 U4.4
NetML_4: ML.4 R29.1 | length 1474.4
  TopLayer w30: v1(3825,4935) 3850,4910 R29.1
  BottomLayer w20: ML.4 3205,5775 3205,5600 3360,5445 3360,5220 3475,5105 3655,5105 v1(3825,4935)
NetML_5: ML.5 R30.1 R31.1 | length 1339.3
  TopLayer w20: v1(3570,4930) 3610,4890 R31.1
  TopLayer w30: R31.1 R30.1
  BottomLayer w20: ML.5 3080,5600 3290,5390 3290,5125 3485,4930 v1(3570,4930)
NetMR_1: MR.1 U5.1 | length 120
  TopLayer w30: MR.1 U5.1
NetMR_2: MR.2 U5.4 | length 140.7
  TopLayer w30: MR.2 3130,5350 U5.4
NetMR_4: MR.4 R33.1 | length 557.9
  TopLayer w20: v1@3415,4925 R33.1
  TopLayer w30: v1@3415,4925 v1(3415,4930)
  BottomLayer w20: MR.4 3350,4930 v1(3415,4930)
NetMR_5: MR.5 R34.1 R35.1 | length 390.7
  TopLayer w30: MR.5 3080,4900 R35.1 R34.1
NetPOWER_1: POWER.1 SW.1 | length 880.8
  BottomLayer w50: SW.1 3230,3400 3350,3520 3650,3520 POWER.1
NetQ1_2: Q1.2 SPEAK.2 | length 665.7
  TopLayer w10: SPEAK.2 4460,3403.23 4719.23,3144 4721,3144 4764,3101 4764,3095.09 4819.09,3040 Q1.2
NetQ2_1: 
NetQ2_3: 
NetQ3_1: 
NetQ4_1: 
NetQ4_3: 
NetQ5_1: 
NetQ6_2: Q6.1 R31.2 | length 419
  TopLayer w15: R31.2 3610,4610 3680,4540 Q6.1
NetQ7_2: Q7.1 R35.2 | length 383.6
  TopLayer w15: R35.2 3130,4565 3175,4520 Q7.1
NetR16_2: R16.2 U3.3 U3.4 U3.5 | length 255.2
  TopLayer w20: U3.5 U3.4 U3.3 5500,5025 R16.2
NetR18_2: R18.2 U6.5 | length 95
  TopLayer w20: U6.5 R18.2
P00: MCU.37 RP6.9 U7.2 U8.2 | length 2621.2
  TopLayer w10: MCU.37 4867.24,4872.24 5060,5065 5060,5195 5030,5225 4910,5225 4891,5244 4891,6006 RP6.9
  TopLayer w20: RP6.9 5080,6195 U7.2 5285,6195 v2(5340,6140) 5340,5795 5215,5670 U8.2
P01: MCU.36 RP6.8 U7.3 U8.3 | length 2543.3
  TopLayer w10: MCU.36 4898.74,4868.74 5076,5046 5076,5201.63 5036.63,5241 4919,5241 4907,5253 4907,5922 RP6.8
  TopLayer w20: RP6.8 5015,6060 5100,6145 U7.3 5260,6145 5305,6100 v2(5305,5830) ; U8.3 5230,5620 v2(5345,5735)
  BottomLayer w20: v2(5305,5830) 5305,5775 v2(5345,5735)
P02: MCU.35 RP6.7 U7.4 U8.4 | length 2482.7
  TopLayer w10: MCU.35 4930.24,4875.24 5092,5037 5092,5208.25 5043.25,5257 4945,5257 4923,5279 4923,5838 RP6.7 ; U8.4 5265,5570 5330,5635 v2(5330,5665)
  TopLayer w20: RP6.7 5015,5955 5061,6001 5061,6069.23 5086.77,6095 U7.4 5255,6095 5271,6079 5271,5856 v2(5270,5855)
  BottomLayer w10: v2(5270,5855) 5270,5735 5330,5675 v2(5330,5665)
P03: MCU.34 RP6.6 U7.5 U8.5 | length 1998.7
  TopLayer w10: MCU.34 4961.73,4881.73 5108,5028 5108,5214.88 5049.88,5273 4956,5273 4956,5771 RP6.6 5015,5787.98 5056,5746.98 5056,5714 5088,5682 5088,5537 5105,5520 U8.5
  TopLayer w20: RP6.6 5015,5865 5034,5884 5034.05,5884 5087,5936.95 5087,6032 5100,6045 U7.5
P04: MCU.33 RP6.5 U7.6 U8.6 | length 2422.9
  TopLayer w10: RP6.5 5015,5687.98 5072,5630.98 5072,5503 5105,5470 U8.6 5215,5470 v2(5335,5590) ; MCU.33@5040,4660 MCU.33 5038.5,4888.5 5140,4990 5140,5110 v2(5130,5120) ; U7.6 v2(5205,5995)
  BottomLayer w10: RP6.5 4891,5606 4891,5402.31 4890,5401.31 4890,5265 4925,5230 5020,5230 v2(5130,5120) ; v2(5205,5995) 5225,5995 5245,5975 5245,5866.77 5244,5865.77 5244,5681 v2(5335,5590)
P05: MCU.32 RP6.4 U7.7 U8.7 | length 2092
  TopLayer w10: RP6.4 5015,5595 5056,5554 5056,5484 5120,5420 U8.7 ; MCU.32 5088.5,4628.5 5160,4700 5160,5140 v2(5140,5160) ; U7.7 v2(5205,5945)
  BottomLayer w10: v2(5140,5160) 5112.63,5160 5026.63,5246 4935,5246 4906,5275 4906,5394.68 4907,5395.68 4907,5522 RP6.4 5055,5670 5055,5711.02 5056,5712.02 5056,5896 5105,5945 v2(5205,5945)
P06: MCU.31 RP6.3 U7.8 U8.8 | length 1944.5
  TopLayer w10: RP6.3 5015,5495 5065,5445 5065,5410 5105,5370 U8.8 ; MCU.31 5107.01,4597.01 5181,4671 5181,5165 5141,5205 5140,5204 v2(5140,5200) ; v2(5095,5895) U7.8
  BottomLayer w10: v2(5095,5895) 5095,5871.77 5074,5850.77 5074,5589 RP6.3 4941.63,5456.63 4941.63,5283.37 4963,5262 5033.25,5262 5095.25,5200 v2(5140,5200)
P07: MCU.30 RP6.2 U7.9 U8.9 | length 1881.5
  TopLayer w10: RP6.2 5125,5320 U8.9 ; MCU.30 5125.51,4565.51 5200,4640 v2@5200,5200 ; v2(5105,5845) U7.9
  BottomLayer w10: v2(5105,5845) 5090,5830 5090,5505 RP6.2 4957.63,5372.63 4957.63,5290 4969.63,5278 5039.88,5278 5087.63,5230.25 5159.75,5230.25 5185,5205 v2(5200,5205)
  other v1: 5005,5410
P15: D6.2 MCU.1 | length 2573.3
  TopLayer w10: v2(4075,4580) 4305,4810 v2(4305,4845) ; v2(4095,3280) 4095,2880 D6.2 ; v2(4520,4745) 4520,4670 4530,4660 MCU.1
  BottomLayer w10: v2(4075,4580) 4075,3820 4135,3760 4135,3543.71 4093.57,3502.27 4093.57,3456.29 4095,3454.86 v2(4095,3280) ; v2(4305,4845) 4405,4745 v2(4520,4745)
P40: D5.2 MCU.17 | length 2141.2
  TopLayer w10: D5.2 4165,2720 4095,2720 4065,2750 4065,3300 4320,3555 4400,3555 4515,3670 v1(4515,3770) ; MCU.17 4804.25,4200.75 4805,4200 4810,4200 v1(4820,4190)
  BottomLayer w10: v1(4515,3770) 4520,3775 4520,3890 v1(4820,4190)
P41: D4.2 MCU.28 | length 2903.8
  TopLayer w10: D4.2 4374,2819 4374,2736 4394,2716 4931,2716 v2(5465,3250) ; MCU.28 v2(5107.52,4502.52)
  BottomLayer w10: v2(5107.52,4502.52) 5107.52,4192.48 5300,4000 5300,3490 5390,3400 5390,3275 5415,3250 v2(5465,3250)
P42: D3.2 MCU.39 | length 2294.7
  TopLayer w10: D3.2 4540,2870 4540,3030.56 4575.44,3066 4626.56,3066 4660,3099.44 v2(4660,3100) ; v2(4730,3170) 4550,3350 4550,3754.09 4551,3755.09 4551,3784.91 4550,3785.91 4550,4105 4574,4129 4574,4266.63 4653.37,4346 4764.18,4346 4799.75,4381.56 4799.75,4732.27 MCU.39
  BottomLayer w10: v2(4660,3100) 4660,3105 4725,3170 v2(4730,3170)
P43: D2.2 MCU.6 | length 2158.3
  TopLayer w10: v2(4350,4505) 4352.48,4502.52 MCU.6 ; v1(4395,3445) 4395,3410 4720,3085 4720,2935 D2.2 D2.2@4595,2830
  BottomLayer w10: v2(4350,4505) 4350,3800 v1(4440,3710) 4395,3665 v1(4395,3445)
PUSH: 
RESET: C3.2 MCU.4 R2.2 RST.1 | length 4491.5
  TopLayer w10: v3(4700,4530) 4664.49,4565.51 4459.49,4565.51 4370,4655 4370,5240 4440,5310 4720,5310 4820,5210 R2.2 C3.2
  TopLayer w50: RST.1@4010,2784.09 RST.1@4010,3040
  BottomLayer w10: RST.1@4010,3040 4650,3040 4730,3120 4870,3120 4940,3190 4940,4210 5010,4280 5010,4440 4980,4470 4760,4470 v3(4700,4530)
RXD: MCU.5 U1.2 UART.3 | length 3092.1
  TopLayer w10: U1.2 4475,3800 v3(4485,3810) ; v3(3995,4535) 3995.98,4534.02 MCU.5 4625.98,4534.02 4760.24,4399.76 4760.24,4380.24 v3(4760,4380)
  BottomLayer w10: UART.3 3185,4295 3725,4295 3965,4535 v3(3995,4535) ; v3(4485,3810) 4485,3975 4760,4250 v3(4760,4380)
SPEAK: MCU.22 Q1.1 | length 1848.1
  TopLayer w10: MCU.22 5131.73,4268.27 5300,4100 5300,3530 5410,3420 5410,3220 5230,3040 Q1.1
T0: MCU.10 Q6.2 R32.2 | length 1153.9
  TopLayer w10: Q6.2 3888,4578 ; R32.2 3915,4695 3915,4605 3888,4578 ; MCU.10 4519.47,4376.53 4466,4430 3950,4430 3888,4492 3888,4578
T1: MCU.11 Q7.2 R36.2 | length 1812.3
  TopLayer w10: Q7.2 3338,4558 ; R36.2 3370,4590 3338,4558 ; MCU.11 4522.68,4345.04 4457.72,4410 3980,4410 3895,4325 3420,4325 3338,4407 3338,4558
TA1: DS1.10 U7.19 | length 777.5
  TopLayer w10: U7.19 5480,6195 5543,6258 5897,6258 5930,6225 5930,6155 5985,6100 DS1.10
TA2: DS2.10 U8.19 | length 655.4
  TopLayer w20: U8.19 5470,5670 5570,5770 5915,5770 5985,5700 DS2.10
TUBE1: MCU.2 U7.11 | length 2737.9
  TopLayer w10: v1(4450,4893.5) 4450,4655 4476.5,4628.5 MCU.2
  BottomLayer w10: v1(4450,4893.5) 4450,4959.4 4410.26,4999.14 4410.26,5067.8 4532.09,5189.63 4657.61,5189.63 4747.98,5280 4747.98,5363.32 4709,5402.31 4709,5662.63 4925,5878.63 4925,6180 4960,6215 5027.63,6215 5442.63,5800 v2(5485,5800)
TUBE2: MCU.3 U8.11 | length 1497.8
  TopLayer w10: v2(4405,4795) 4405,4660 4467.99,4597.01 MCU.3
  BottomLayer w10: v2(4405,4795) 4690,5080 5175,5080 5365,5270 v1(5380,5270)
TXD: MCU.7 U1.3 UART.4 | length 2833.6
  TopLayer w10: U1.3 4385,3850 v3(4395,3860) ; v3(4000,4470) 4001.02,4471.02 MCU.7 4620,4471.02 4700,4391.02 v3(4700,4380)
  BottomLayer w10: UART.4 3120,4260 3760,4260 3970,4470 v3(4000,4470) ; v3(4395,3860) 4395,3935 4700,4240 v3(4700,4380)
VCC: C1.1 C2.1 C3.1 C6.2 C7.1 C9.1 C10.1 C11.1 C12.1 C13.1 C14.1 C15.1 DS1.1 DS1.6 DS2.1 DS2.6 irR1.3 irR2.3 irR3.3 irR4.3 irR5.3 MCU.29 MCU.38 ML.3 MR.3 R1.1 R4.1 R5.1 R6.1 R7.1 R8.1 R9.1 R10.1 R11.1 R12.1 R32.1 R36.1 RP6.1 RST.2 SPEAK.1 SW.3 U2.6 U2.16 U3.14 U4.2 U4.3 U5.2 U5.3 U7.20 U8.20 UART.1 | length 25664.8
  TopLayer w10: 3800,6039.36 3800.32,6039.68 ; MCU.38 4835.75,4694.25 4860,4670 4950,4670 4970,4650 4970,4550 4985.98,4534.02 MCU.29 5444.02,4534.02 C7.1 ; C2.1@4835.75,4945.75 C2.1 ; v3(5930,4850) U2.6 ; irR3.3 irR3.3@6660,3097.16
  TopLayer w15: R7.1 3270,5310 3270,5380 3250,5400 U5.3 ; R5.1 3270,6010 3270,6080 3250,6100 U4.3
  TopLayer w20: v1(3140,4940) C15.1 3200,4960 3230,4930 3290,4930 R36.1 ; R1.1 3550,3210 3610,3150 ; MCU.38 C2.1@4835.75,4945.75 ; RP6.1 RP6.1@5022.58,5330 ; v1(5370,6250) 5375,6245 U7.20 5469,6279 5911,6279 DS1.1 6005,6185 6005,6110.7 6110,6005.7 v4(6110,6000) 6110,5990 DS2.1 5920,5800 5550,5800 5470,5720 U8.20 ; C7.1 5600,4690 U3.14 v1(5670,4770) ; DS2.6 5585,5565 v2(5642.5,5507.5) ; v1@5770,5090 5800,5060 v1(5800,4950) ; v4(6210,5160) U2.16 6270,5160 C6.2
  TopLayer w30: U5.3 U5.2 3260,5450 3310,5500 3310,5550 3500,5740 3630,5740 3769.68,5879.68 3800.32,5879.68 ; U4.3 U4.2 3250,6150 3350,6250 3590,6250 3800.32,6039.68 ; 4650,5445 v1(4825,5270) ; C2.1 4900,4950 5000,5050 v1(5000,5125) C3.1 ; v4(6110,6000) 6360,6000 6400,6040 C12.1 irR4.3 6550,6200 6800,5950 irR1.3 C9.1 6830,5620 6830,4810 6610,4590 6610,4440 6650,4400 C10.1 irR2.3 6830,4370 6830,3410 6658.58,3238.58 irR3.3 ; irR5.3 C13.1 6200,2950 6240,2990 C11.1 irR3.3@6660,3097.16
  TopLayer w50: MR.3 3140,5300 R7.1 R6.1 C15.1 ; ML.3 3140,5940 R5.1 R4.1 C14.1 ; SW.3 3310,3180 3345,3145 3735,3145 3836.77,3043.23 3836.77,3040 RST.2@3836.77,2784.09 ; 3800.32,6039.68 3800.32,5879.68 3870,5810 3870,5230 3990,5110 4090,5110 ; R32.1 v1(4080,4670) 4080,5100 4210,5230 4210,5820 4350,5960 4620,5960 4650,5930 4650,5445 ; R12.1 R11.1 R10.1 ; v1(4330,3235) 4375,3190 R10.1 ; R8.1 4600,3110 R10.1
  BottomLayer w20: UART.1 3080,4880 v1(3140,4940) ; RP6.1 5530,5330 v1(5760,5100) 5760,5390 v2(5642.5,5507.5) 5812.5,5507.5 6160,5160 v4(6210,5160) 6270,5100 6780,5100 6800,5120 irR1.3 ; v1(5370,6250) 5370,6175 5540,6005 DS1.6 ; v1(5670,4770) 5800,4900 v1(5800,4950) 5900,4850 v3(5930,4850)
  BottomLayer w30: v1(4825,5270) 4970,5125 v1(5000,5125)
  BottomLayer w50: SW.3 3310,3200 3360,3150 3726.77,3150 ; RST.2@3836.77,3040 3726.77,3150 ; v1(4080,4670) 4300,4450 4300,3475 ; SPEAK.1 4145,3475 4300,3475 ; 4370,3150 4250,3150 ; C1.1 v1@4340,3240 ; 3726.77,3150 4250,3150 ; 4250,3150 v1@4340,3240 ; 4300,3475 4300,3280 v1@4340,3240
pads on no net: DWL.0 DWR.0 MCU.26 MCU.27 MOTORL.0@3580,5440 MOTORL.0@3580,5840 MOTORL.0@4500,5020 MOTORL.0@4500,5240 MOTORL.0@4500,5440 MOTORL.0@4500,5840 MOTORR.0@5100,3160 MOTORR.0@5100,3560 MOTORR.0@5100,3760 MOTORR.0@5100,3980 MOTORR.0@6020,3160 MOTORR.0@6020,3560 MOTORR.0@6020,3760 MOTORR.0@6020,3980 SW.0 U1.9 U1.10 U1.11 U1.12 U1.13 U1.14 U1.15 U2.7 U2.9 U2.10 U3.8 U3.11 UWB.0 UWF.0
copper on no net:
  other v5: 3070,3280 3390,3280 3070,3290 3390,3290 3070,3310 3390,3310 3070,3320 3390,3320
  other v6: 3208.35,3909.29 3210.31,4068.35

## Polygon pours and split planes (outlines as drawn)
GND on TopLayer "Top Layer-No Net" (hatched 90Degree grid 20 track 20, remove dead copper, pour order 4): 3000,6325 3000,2680 6920,2680 6925,2675 6925,6325
GND on BottomLayer "Top Layer-No Net" (hatched 90Degree grid 20 track 20, remove dead copper, pour order 6): 3000,6325 3000,2675 6925,2675 6925,6325

## Keep-outs
KeepOutLayer:
  lines w10: 3020,2735 3020,6275 ; 3020,2750 ccw(c3065,2745) 3060,2700 6820,2700 ; 3020,6265 cw(c3052.5,6267.5) 3050,6300 6825,6300 ; 6805,2700 ccw(c6810,2790) 6900,2785 6900,6235 ccw(c6827.5,6227.5) 6820,6300

## Silkscreen, mask and mechanical layers (free items; w line width, h text height)
TopOverlay:
  circle w20: c4660,4650 r10
  circle w10: c5560,3370 r150
  circle w10: c4040,5630 r150
  lines w10: 3540,5630 ccw(c4040,5630) 4540,5630 4540,6280 4040,6280 3540,6280 3540,5630 ; 5060,2720 5060,3370 cw(c5560,3370) 6060,3370 6060,2720 5560,2720 5060,2720
  text "1" at 3140,6210 h60 r270
  text "1" at 3140,5510 h60 r270
  text "+" at 3045,4660 h60
  text "-" at 3185,4480 h60 r90
  text "RxD" at 3145,4435 h30 r270
  text "TxD" at 3145,4325 h30 r270
  text "-" at 3990,3170 h60 r180
  text "+" at 3900,3120 h60 r90
Mechanical4:
  lines w10: 3010,2690 3010,6310 6910,6310 6910,2690 3010,2690

## Text inside footprints (layer, text, board x,y; h text height)
SPEAK: TopOverlay "BUZZ" at 4215,3550 h50